# EAGLE board Cozy_Motor_Controller (EAGLE 6.3)
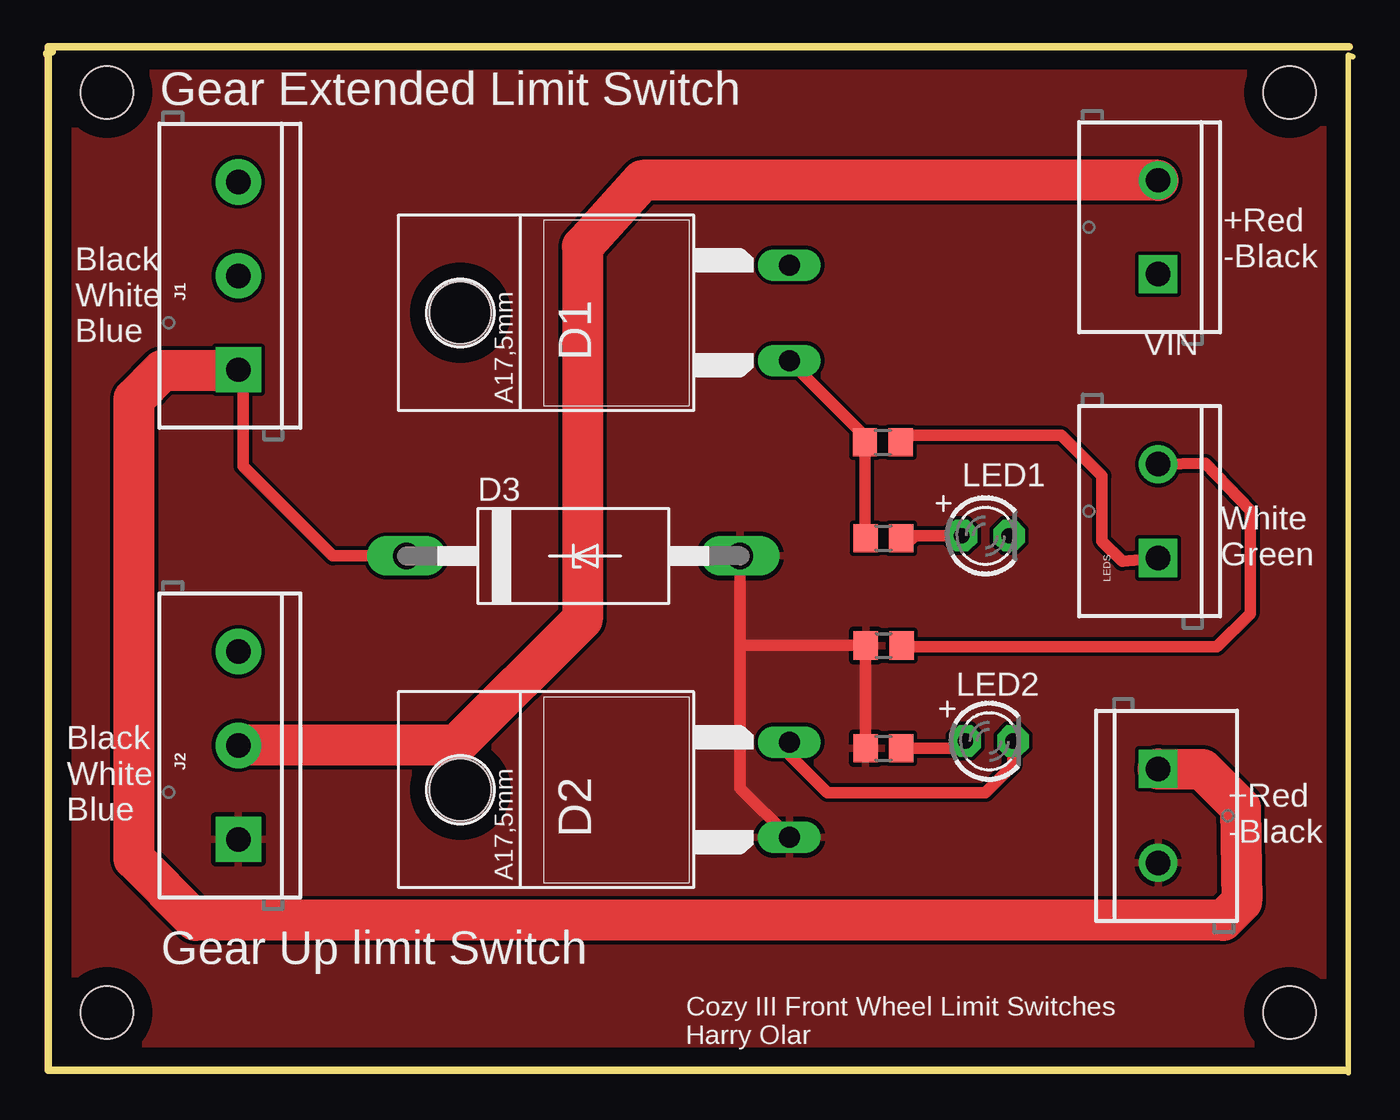
[diagram p0: board, top side]
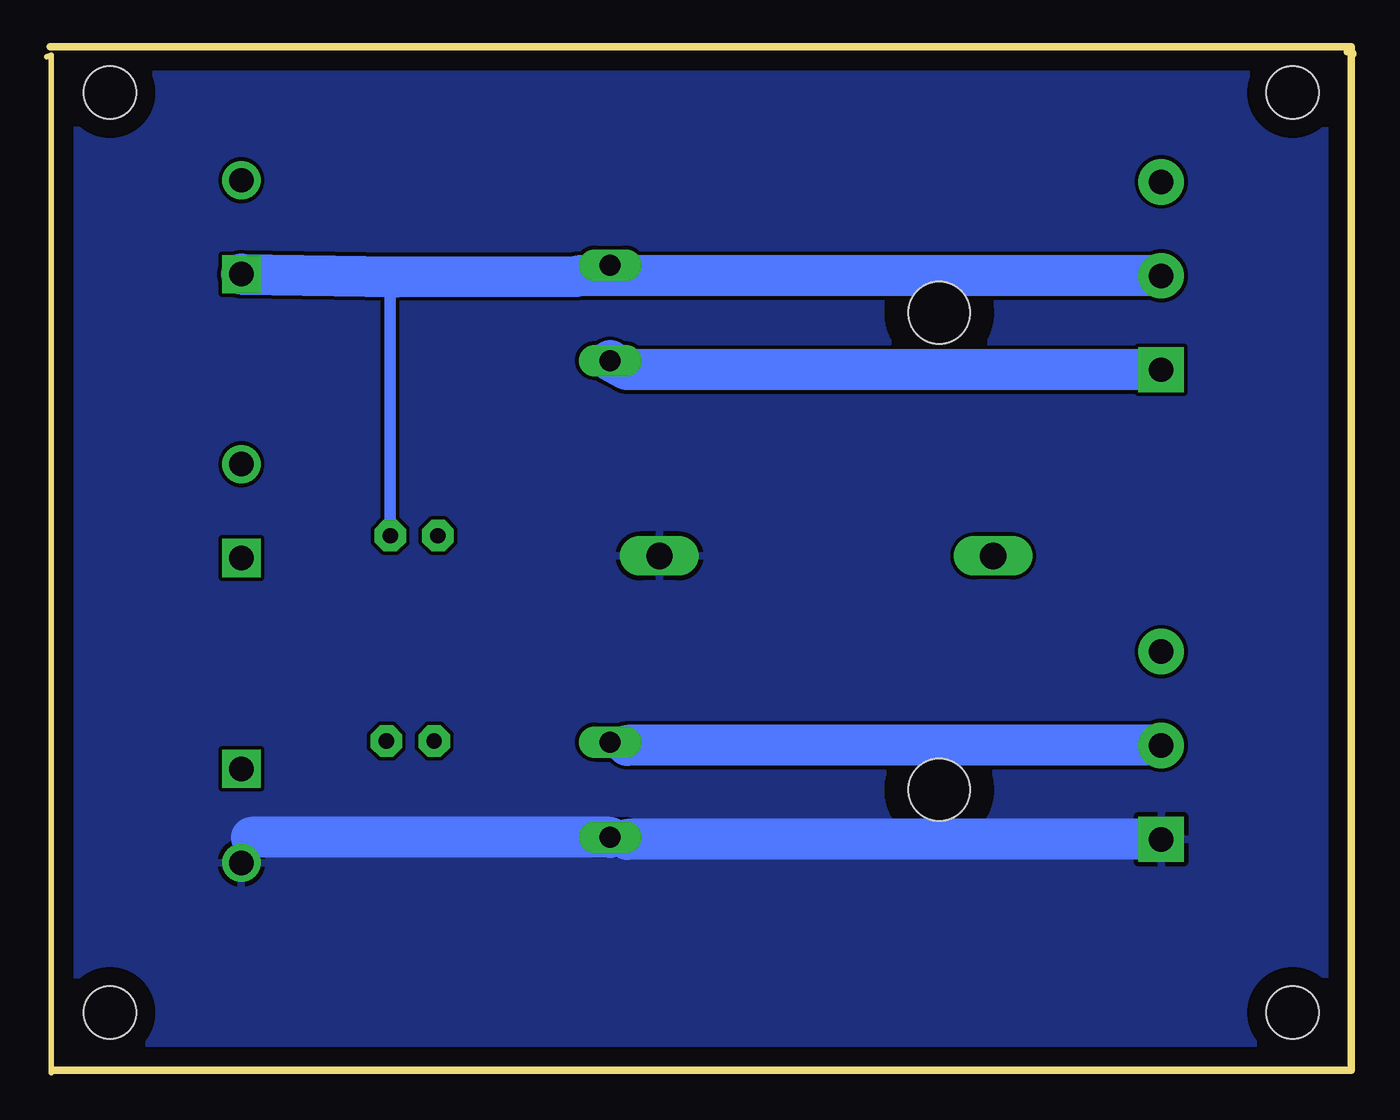
[diagram p1: board, bottom side, seen from below]

Size 69.56 x 54.63 mm. Coordinates in mm from the lower left corner, seen from the top.
Outline: 0.27,54.37 0.07,54.37
Outline: 0.07,54.37 0.07,54.23
Outline: 0.07,54.23 0.07,0.13 69.27,0.13
Outline: 69.39,54.63 0.07,54.63 0.07,54.37
Outline: 0.07,54.23 0,54.23 0,54.3
Outline: 69.56,54.11 69.33,54.18 69.33,0
Copper layers (1*16): Top 0.035mm / dielectric 1.5mm / Bottom 0.035mm
Design rules "default": minimum track width 10mil, minimum drill 24mil, track to track 8mil, track to pad 8mil, pad to pad 8mil, via to via 8mil, smd to smd 8mil, copper to edge 40mil, drill to drill 8mil, minimum pad ring 10mil, minimum via ring 8mil, stop-mask expansion 4mil, vias tented up to drill 0mil, thermal gap 10mil
Holes 2.8 mm at 3.2,3.2 3.2,52.2 66.2,52.2 66.2,3.2

## Footprints (pad centres in the part's own frame; a part is rotated, then mirrored left to right if it is on the bottom)
C221B1A = drill 1.118 long: A 2.54,-6.35; C -2.54,-6.35 | hole 3.302: 0,11.176
CB429-17 = drill 1.397 long: A 8.89,0; C -8.89,0
SCREWTERMINAL-5MM-3 = drill 1.3 pad 2.413 square: 1 0,0 | drill 1.3 pad 2.413: 2 5,0; 3 10,0
SCREWTERMINAL-5MM-2 = drill 1.3 pad 2.032 square: 1 0,0 | drill 1.3 pad 2.032: 2 5,0
LED3MM = drill 0.813 pad 1.676 octagon: A -1.27,0; K 1.27,0
R0805 = smd 1.3 x 1.5: 1 -0.95,0; 2 0.95,0

## Placement (x,y rotation side)
D1  [C221B1A]  33.2,40.47 90 top
D2  [C221B1A]  33.2,15.07 90 top
D3  15KEXXC  [CB429-17]  28.04,27.52 0 top
J1  [SCREWTERMINAL-5MM-3]  10.2,37.44 90 top
J2  [SCREWTERMINAL-5MM-3]  10.2,12.43 90 top
JP5  Motor1 Out  [SCREWTERMINAL-5MM-2]  59.2,16.18 270 top
LED1  Gear Down LED  [LED3MM]  50,28.6 0 top
LED2  Gear UP LED  [LED3MM]  50.2,17.66 0 top
LEDS  Leds  [SCREWTERMINAL-5MM-2]  59.2,27.41 90 top
R3  680  [R0805]  44.53,33.57 0 top
R4  680  [R0805]  44.58,22.75 0 top
R5  680  [R0805]  44.56,28.47 0 top
R6  680  [R0805]  44.56,17.28 0 top
VIN  - +  [SCREWTERMINAL-5MM-2]  59.2,42.53 90 top

## Library data of the parts
D1-D3 = diode
J1 J2 = SparkFun-Connectors; PROD_ID: CONN-10134; SF_SKU: PRT-08433
JP5 LEDS VIN = SparkFun-Connectors
LED1 LED2 = adafruit
R3-R6 = rcl

## Nets
GND: D2.C D3.A J2.1 JP5.2 R4.1 R6.1
N$1: LEDS.1 R3.2
N$2: LEDS.2 R4.2
N$2RED: D1.A J1.2 LED1.K VIN.1
N$3: D2.A J2.2 LED2.K VIN.2
N$4: D1.C D3.C J1.1 JP5.1 R3.1 R5.1
N$5: LED2.A R6.2
N$6: LED1.A R5.2

## Tracks (layer width: path | path; a pad name or v marks a point on that pad's centre or on a via)
GND
  Top 0.61: R4.1 43.61,22.73 R6.1 43.61,22.63 43.48,22.76 36.93,22.76 | D3.A 36.93,22.76 | 36.93,22.76 36.93,15.15 D2.C
  Bottom 1.422: 38.63,12.43 D2.C | 58.67,12.53 JP5.2
  Bottom 2.184: J2.1 38.63,12.43 | D2.C 58.67,12.53
  pour Bottom: 4.4,0.63 69.89,0.63 69.89,53.72 0.73,53.66 0.73,0.59
  pour Top: 0.46,53.91 0.46,0.39 69.45,0.53 69.45,54.37 0.46,54.23 0.46,54.1 0.53,54.1 0.53,53.97
N$1
  Top 0.61: LEDS.1 57.29,27.23 56.21,28.31 56.21,31.78 54.05,33.94 45.85,33.94 R3.2
N$2
  Top 0.61: LEDS.2 61.72,32.46 64.1,29.95 64.1,24.45 62.34,22.69 45.59,22.69 R4.2
N$2RED
  Bottom 0.61: LED1.K 51.27,42.03 50.92,42.38
  Bottom 1.422: 41.35,42.41 D1.A 41.29,42.44
  Bottom 2.184: VIN.1 50.92,42.38 41.35,42.41 | J1.2 41.29,42.44
N$3
  Top 0.61: LED2.K 51.47,16.38 50.01,14.92 41.59,14.92 39,17.5 39.44,17.5 D2.A
  Top 2.184: VIN.2 31.72,47.52 28.53,44 28.53,24.15 21.81,17.43 J2.2
  Bottom 1.422: 38.63,17.43 D2.A
  Bottom 2.184: J2.2 38.63,17.43
N$4
  Top 0.61: R5.1 43.58,28.47 R3.1 43.58,33.9 D1.C | D3.C 15.23,27.52 10.45,32.3 10.45,37.19 J1.1
  Top 1.27: 10.16,37.4 J1.1
  Top 2.184: JP5.1 61.56,16.16 63.59,14.13 63.65,9.1 62.67,8.12 7.91,8.12 4.64,11.39 4.64,35.9 6.14,37.4 10.16,37.4
  Bottom 2.184: J1.1 38.68,37.44 D1.C
N$5
  Top 0.61: R6.2 48.55,17.28 LED2.A
N$6
  Top 0.61: LED1.A 46.24,28.6 46.02,28.38 45.6,28.38 R5.2

## Text on the board
tNames: Gear Extended Limit Switch | +Red / -Black | Black / White / Blue | White / Green | Black / White / Blue | +Red / -Black | Gear Up limit Switch | Cozy III Front Wheel Limit Switches / Harry Olar